# EAGLE board Spark (EAGLE 6.5.0)
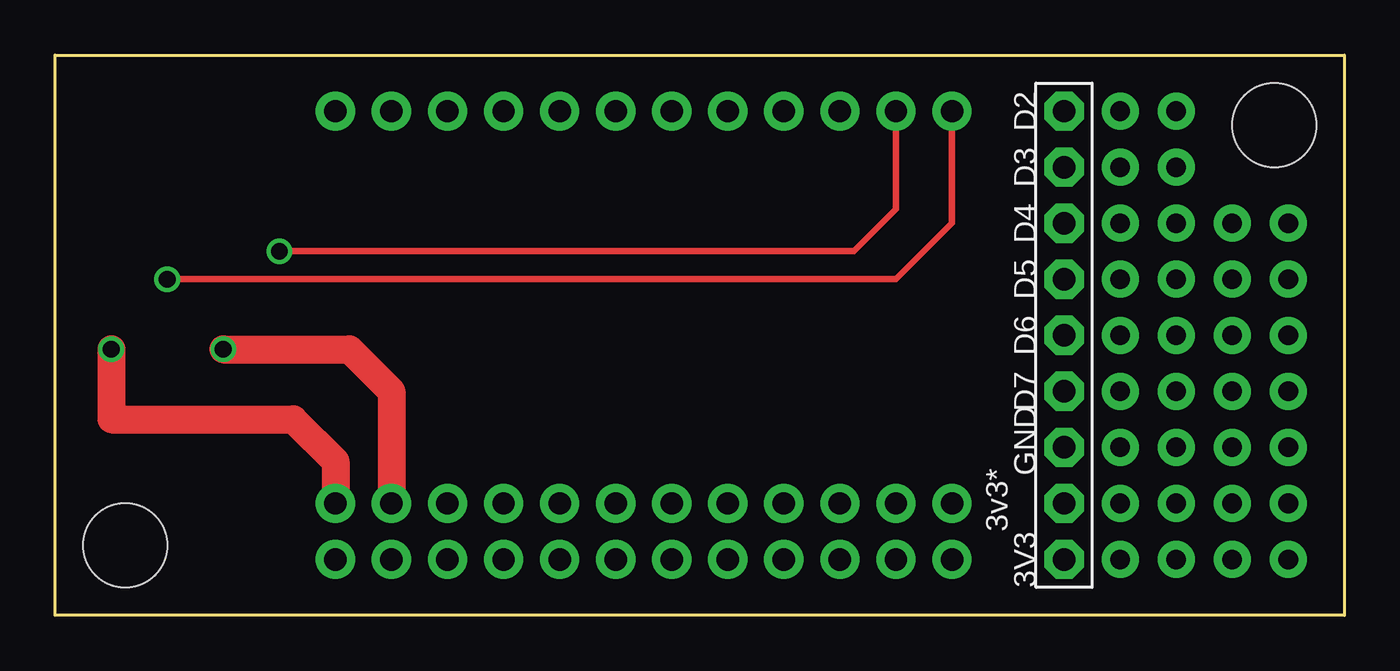
[diagram p0: board, top side]
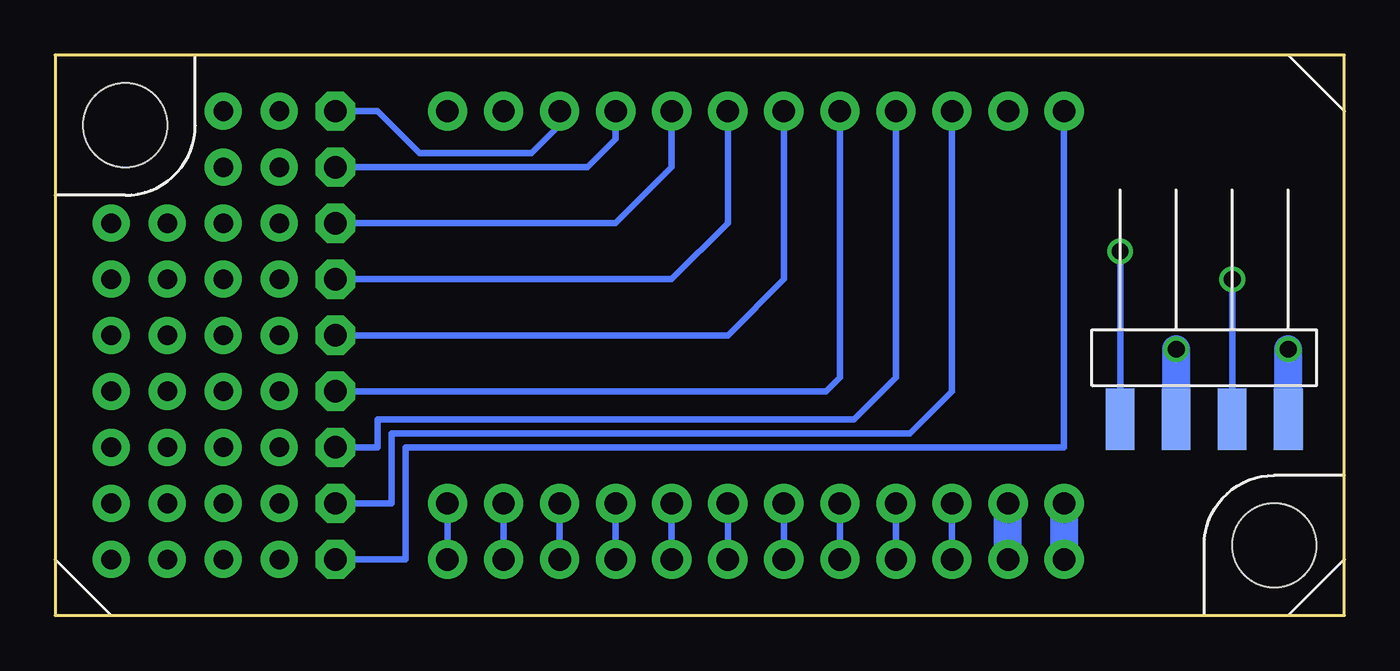
[diagram p1: board, bottom side, seen from below]

Size 58.42 x 25.4 mm. Coordinates in mm from the lower left corner, seen from the top.
Copper layers (1*16): Top 0.0178mm / dielectric 59mil / Bottom 0.0178mm
Design rules "SSC-EAGLE-2Lyr_v1.0.0.3": minimum track width 6mil, minimum drill 14mil, track to track 6mil, track to pad 6mil, pad to pad 6mil, via to via 6mil, smd to smd 6mil, copper to edge 20mil, drill to drill 16mil, minimum pad ring 8mil, minimum via ring 8mil, stop-mask expansion 3mil, vias tented up to drill 0mil, thermal gap 10mil

## Footprints (pad centres in the part's own frame; a part is rotated, then mirrored left to right if it is on the bottom)
1X12-CB = drill 1.016 pad 1.778: 1 -13.97,0; 2 -11.43,0; 3 -8.89,0; 4 -6.35,0; 5 -3.81,0; 6 -1.27,0; 7 1.27,0; 8 3.81,0; 9 6.35,0; 10 8.89,0; 11 11.43,0; 12 13.97,0
1X09-BIG = drill 1.016 pad 1.778 octagon: 1 -10.16,0; 2 -7.62,0; 3 -5.08,0; 4 -2.54,0; 5 0,0; 6 2.54,0; 7 5.08,0; 8 7.62,0; 9 10.16,0
FOOTPRINT-DOUBLE = smd 1.27 x 1.27 bottom: MISO 15.24,22.86; RESET 12.7,22.86 | smd 1.295 x 2.794 bottom: P$1 2.54,8.89; P$2 5.08,8.89; P$3 7.62,8.89; P$4 10.16,8.89 | hole 3.81: 55.245,22.225; 3.175,3.175

## Placement (x,y rotation side)
JP1  [1X12-CB]  26.67,5.08 0 top
JP2  [1X12-CB]  26.67,22.86 180 top
JP7  [1X12-CB]  26.67,2.54 0 top
JP10  [1X09-BIG]  45.72,12.7 270 top
U$1  FOOTPRINTDOUBLE  [FOOTPRINT-DOUBLE]  0,0 0 top

## Library data of the parts
JP1 JP2 JP7 JP10 = adafruit
U$1 = IntegerLabs

## Nets
GND: JP1.2 JP7.2 U$1.P$3
N$5: JP2.3 JP10.1
N$6: JP2.4 JP10.2
N$7: JP2.5 JP10.3
N$8: JP2.6 JP10.4
N$9: JP2.7 JP10.5
N$10: JP2.8 JP10.6
N$11: JP2.9 JP10.7
N$12: JP2.10 JP10.8
N$13: JP2.12 JP10.9
N$14: JP1.3 JP7.3
N$15: JP1.4 JP7.4
N$16: JP1.5 JP7.5
N$17: JP1.6 JP7.6
N$18: JP1.7 JP7.7
N$19: JP1.8 JP7.8
N$20: JP1.9 JP7.9
N$21: JP1.10 JP7.10
N$22: JP1.11 JP7.11
N$23: JP1.12 JP7.12
SCL: JP2.2 U$1.P$4
SDA: JP2.1 U$1.P$2
VIN: JP1.1 JP7.1 U$1.P$1

## Tracks (layer width: path | path; a pad name or v marks a point on that pad's centre or on a via)
GND  (via drill 0.76)
  Top 1.27: v7.62,12.06 13.34,12.06 15.24,10.16 JP1.2
  Bottom 1.27: U$1.P$3 v7.62,12.06 | JP7.2 JP1.2
N$1  (via drill 0.89 pad 1.68)
  other vias: 55.88,2.54 53.34,2.54 50.8,2.54 48.26,2.54 48.26,5.08 50.8,5.08 53.34,5.08 55.88,5.08 55.88,7.62 53.34,7.62 50.8,7.62 48.26,7.62 48.26,10.16 50.8,10.16 53.34,10.16 55.88,10.16 55.88,12.7 53.34,12.7 50.8,12.7 48.26,12.7 48.26,15.24 50.8,15.24 53.34,15.24 55.88,15.24 55.88,17.78 53.34,17.78 50.8,17.78 48.26,17.78 48.26,20.32 50.8,20.32 50.8,22.86 48.26,22.86
N$5
  Bottom 0.305: JP10.1 43.81,22.86 41.91,20.95 36.83,20.95 35.56,22.23 JP2.3
N$6
  Bottom 0.305: JP10.2 34.29,20.32 33.02,21.59 JP2.4
N$7
  Bottom 0.305: JP10.3 33.02,17.78 30.48,20.32 JP2.5
N$8
  Bottom 0.305: JP10.4 30.48,15.24 27.94,17.78 JP2.6
N$9
  Bottom 0.305: JP10.5 27.94,12.7 25.4,15.24 JP2.7
N$10
  Bottom 0.305: JP10.6 23.5,10.16 22.86,10.79 JP2.8
N$11
  Bottom 0.305: JP10.7 43.81,7.62 43.81,8.89 22.23,8.89 20.32,10.79 JP2.9
N$12
  Bottom 0.305: JP10.8 43.18,5.08 43.18,8.26 19.68,8.26 17.78,10.16 JP2.10
N$13
  Bottom 0.305: JP10.9 42.55,2.54 42.55,7.62 12.7,7.62 JP2.12
N$14
  Bottom 0.305: JP7.3 JP1.3
N$15
  Bottom 0.305: JP7.4 JP1.4
N$16
  Bottom 0.305: JP7.5 JP1.5
N$17
  Bottom 0.305: JP7.6 JP1.6
N$18
  Bottom 0.305: JP7.7 JP1.7
N$19
  Bottom 0.305: JP7.8 JP1.8
N$20
  Bottom 0.305: JP7.9 JP1.9
N$21
  Bottom 0.305: JP7.10 JP1.10
N$22
  Bottom 0.305: JP7.11 JP1.11
N$23
  Bottom 0.305: JP1.12 JP7.12
SCL  (via drill 0.76)
  Top 0.305: JP2.2 38.1,18.41 36.2,16.51 v10.16,16.51
  Bottom 0.305: U$1.P$4 v10.16,16.51
SDA  (via drill 0.76)
  Top 0.305: JP2.1 40.64,17.78 38.1,15.24 v5.08,15.24
  Bottom 0.305: U$1.P$2 v5.08,15.24
VIN  (via drill 0.76)
  Top 1.27: v2.54,12.06 U$1.P$1 10.79,8.89 12.7,6.99 JP1.1
  Bottom 1.27: U$1.P$1 v2.54,12.06 | JP1.1 JP7.1

## Text on the board
tPlace: D2 | D3 | D4 | D5 | D6 | D7 | GND | 3v3* | 3V3